# EAGLE board DSP_Lab_SS21_Equalizer_VUMeter_fin (EAGLE 9.6.2)
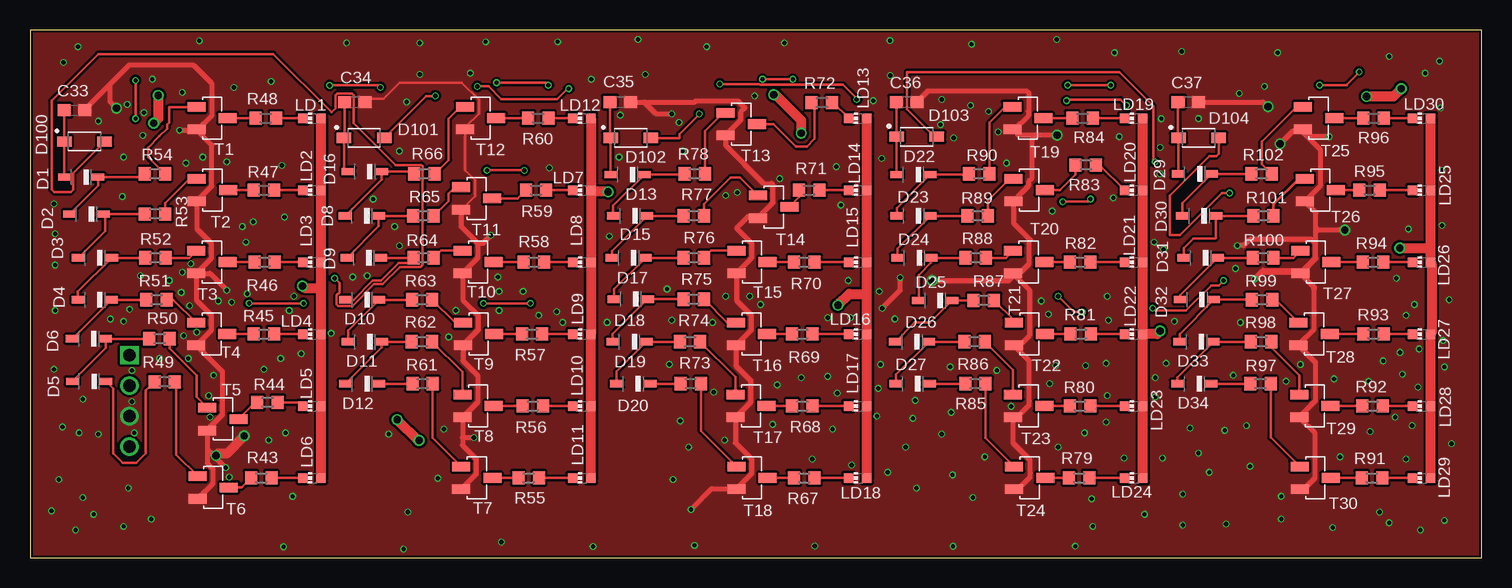
[diagram p0: board, top side]
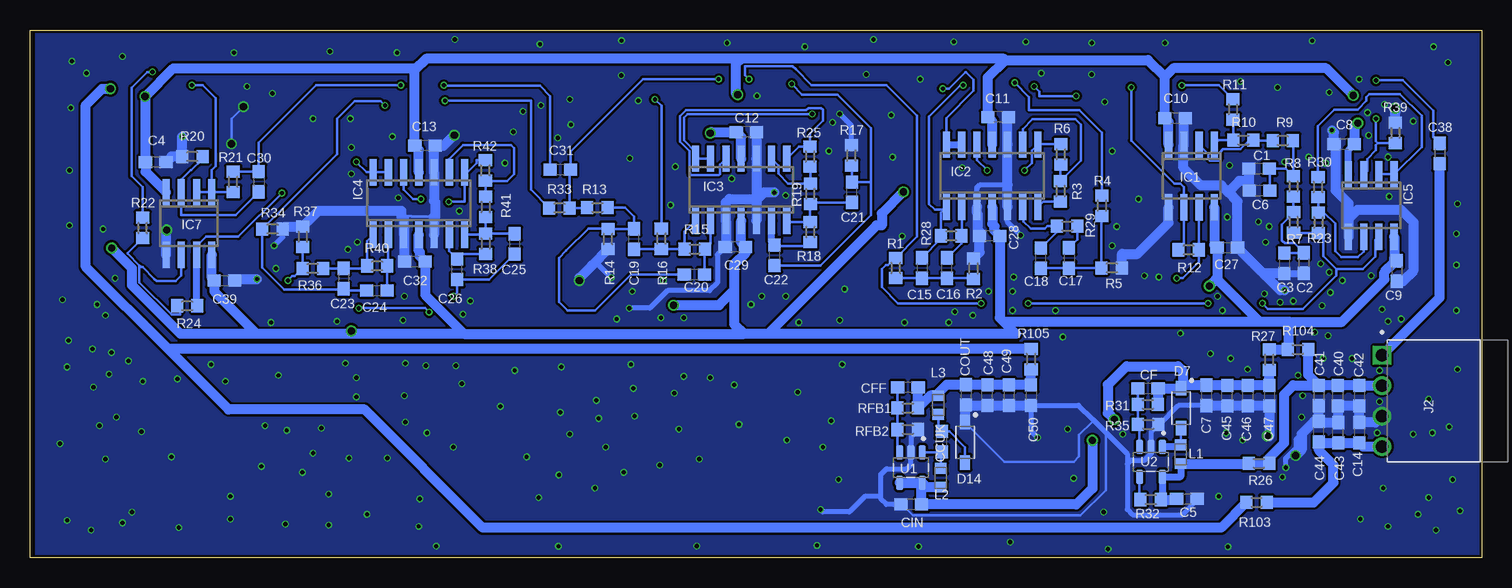
[diagram p1: board, bottom side, seen from below]

Size 121 x 44 mm. Coordinates in mm from the lower left corner, seen from the top.
Outline: 0,44 0,0 121,0 121,44 0,44
Copper layers (1*16): Top 0.018mm / dielectric 1.55mm / Bottom 0.018mm
Design rules "Multi-CB_2L_100µm-Tracks_OL35µm *": minimum track width 0.2mm, minimum drill 0.2mm, track to track 0.1mm, track to pad 0.1mm, pad to pad 0.1mm, via to via 0.1mm, smd to smd 0mil, copper to edge 0.2mm, drill to drill 0.2mm, minimum pad ring 0.125mm, minimum via ring 0.1mm, stop-mask expansion 2mil, vias tented up to drill 0.45mm, thermal gap 0.2mm
Net classes: 0 default: width 0.003 mm, drill 0.1 mm

## Footprints (pad centres in the part's own frame; a part is rotated, then mirrored left to right if it is on the bottom)
C0603 = smd 1.1 x 1: 1 -0.85,0; 2 0.85,0
SODFL2512X100N = smd 1.05 x 0.6: A 1.4,0; C -1.4,0
SOD3715X135L32X57N = smd 1.21 x 0.84: 1 -1.68,0; 2 1.68,0
SO08 = smd 0.6 x 2.2: 1 -1.905,-2.6; 2 -0.635,-2.6; 3 0.635,-2.6; 4 1.905,-2.6; 5 1.905,2.6; 6 0.635,2.6; 7 -0.635,2.6; 8 -1.905,2.6
SO14 = smd 0.6 x 2.2: 1 -3.81,-2.6; 2 -2.54,-2.6; 3 -1.27,-2.6; 4 0,-2.6; 5 1.27,-2.6; 6 2.54,-2.6; 7 3.81,-2.6; 8 3.81,2.6; 9 2.54,2.6; 10 1.27,2.6; 11 0,2.6; 12 -1.27,2.6; 13 -2.54,2.6; 14 -3.81,2.6
TE_640455-4 = drill 1.02 pad 1.37 square: 1 0,0 | drill 1.02 pad 1.37: 2 -2.54,0; 3 -5.08,0; 4 -7.62,0
INDC1608X95N = smd 0.9 x 0.97: 1 -0.785,0; 2 0.785,0
CHIP-LED0603 = smd 0.8 x 0.8: A 0,-0.75; C 0,0.75
R0603 = smd 1 x 1.1: 1 -0.85,0; 2 0.85,0
SOT23-3 = smd 0.8 x 1.5: 1 -0.6,-1.35; 2 1.3,-1.35; 3 0.35,1.25
SOT95P280X145-5N = smd 1.21 x 0.59: 1 -1.255,0.95; 2 -1.255,0; 3 -1.255,-0.95; 4 1.255,-0.95; 5 1.255,0.95

## Placement (x,y rotation side)
C1  220n  [C0603]  18.54,32.42 180 bottom
C2  220n  [C0603]  14.81,24.56 270 bottom
C3  100n  [C0603]  16.44,24.53 270 bottom
C4  100n  [C0603]  110.52,32.98 180 bottom
C5  2.2 uF  [C0603]  24.56,4.9 0 bottom
C6  100n  [C0603]  18.5,30.6 180 bottom
C7  4.7 uF  [C0603]  22.95,13.52 270 bottom
C8  100n  [C0603]  11.45,34.49 0 bottom
C9  100n  [C0603]  7.08,23.9 270 bottom
C10  100n  [C0603]  25.55,36.63 180 bottom
C11  100n  [C0603]  40.3,36.75 180 bottom
C12  100n  [C0603]  61.28,35.5 180 bottom
C13  100n  [C0603]  88.07,34.35 180 bottom
C14  10u  [C0603]  10.18,10.41 270 bottom
C15  100n  [C0603]  46.65,24.15 270 bottom
C16  100n  [C0603]  44.55,24.14 90 bottom
C17  100n  [C0603]  34.39,24.98 270 bottom
C18  100n  [C0603]  36.73,24.97 90 bottom
C19  10n  [C0603]  70.63,26.56 90 bottom
C20  10n  [C0603]  65.61,23.61 0 bottom
C21  10n  [C0603]  52.48,30.47 90 bottom
C22  10n  [C0603]  58.92,25.22 90 bottom
C23  10n  [C0603]  94.86,23.27 270 bottom
C24  10n  [C0603]  92.09,22.28 0 bottom
C25  10n  [C0603]  80.6,26.15 270 bottom
C26  10n  [C0603]  85.38,24.04 90 bottom
C27  100n  [C0603]  21.19,25.84 0 bottom
C28  100n  [C0603]  41,26.82 180 bottom
C29  100n  [C0603]  62.2,25.91 180 bottom
C30  12n  [C0603]  101.92,31.35 270 bottom
C31  15n  [C0603]  76.8,32.35 180 bottom
C32  100n  [C0603]  88.91,24.68 180 bottom
C33  200u  [C0603]  3.71,37.3 0 top
C34  100u  [C0603]  27.09,38 0 top
C35  100u  [C0603]  49.2,38 0 top
C36  100u  [C0603]  73.08,38 0 top
C37  200u  [C0603]  96.55,38 0 top
C38  100n  [C0603]  3.5,33.7 270 bottom
C39  100n  [C0603]  104.79,23.1 0 bottom
C40  10u  [C0603]  11.96,13.5 90 bottom
C41  10u  [C0603]  13.56,13.51 270 bottom
C42  10u  [C0603]  10.19,13.5 270 bottom
C43  10u  [C0603]  11.95,10.41 90 bottom
C44  10u  [C0603]  13.56,10.51 90 bottom
C45  10u  [C0603]  21.2,13.5 90 bottom
C46  10u  [C0603]  19.5,13.5 270 bottom
C47  10u  [C0603]  17.7,13.5 270 bottom
C48  10u  [C0603]  41.2,13.55 90 bottom
C49  10u  [C0603]  39.4,13.55 270 bottom
C50  10u  [C0603]  37.55,13.55 270 bottom
CCUK  1 uF  [C0603]  45,9.66 90 bottom
CF  220 pF  [C0603]  27.8,14.1 180 bottom
CFF  330 pF  [C0603]  47.81,14.2 180 bottom
CIN  22 uF  [C0603]  47.54,4.42 180 bottom
COUT  22 uF  [C0603]  42.98,13.57 270 bottom
D1  1N4148WS  [SODFL2512X100N]  4.27,31.72 180 top
D2  1N4148WS  [SODFL2512X100N]  4.71,28.65 180 top
D3  1N4148WS  [SODFL2512X100N]  5.41,25 180 top
D4  1N4148WS  [SODFL2512X100N]  5.4,21.5 180 top
D5  1N4148WS  [SODFL2512X100N]  4.93,14.7 180 top
D6  1N4148WS  [SODFL2512X100N]  4.9,18.25 180 top
D7  [SOD3715X135L32X57N]  25.04,12.46 270 bottom
D8  1N4148WS  [SODFL2512X100N]  27.67,28.5 180 top
D9  1N4148WS  [SODFL2512X100N]  27.84,25 180 top
D10  1N4148WS  [SODFL2512X100N]  27.69,21.5 180 top
D11  1N4148WS  [SODFL2512X100N]  27.92,18 180 top
D12  1N4148WS  [SODFL2512X100N]  27.69,14.5 180 top
D13  1N4148WS  [SODFL2512X100N]  49.81,31.95 180 top
D14  [SOD3715X135L32X57N]  43.05,9.61 270 bottom
D15  1N4148WS  [SODFL2512X100N]  50.02,28.5 180 top
D16  1N4148WS  [SODFL2512X100N]  27.91,32.2 180 top
D17  1N4148WS  [SODFL2512X100N]  49.9,25 180 top
D18  1N4148WS  [SODFL2512X100N]  50.09,21.55 180 top
D19  1N4148WS  [SODFL2512X100N]  49.97,18 180 top
D20  1N4148WS  [SODFL2512X100N]  50.29,14.5 180 top
D22  1N4148WS  [SODFL2512X100N]  73.64,31.95 180 top
D23  1N4148WS  [SODFL2512X100N]  73.65,28.5 180 top
D24  1N4148WS  [SODFL2512X100N]  73.72,25 180 top
D25  1N4148WS  [SODFL2512X100N]  75.46,21.45 180 top
D26  1N4148WS  [SODFL2512X100N]  73.53,18 180 top
D27  1N4148WS  [SODFL2512X100N]  73.59,14.5 180 top
D29  1N4148WS  [SODFL2512X100N]  97.09,32 180 top
D30  1N4148WS  [SODFL2512X100N]  97.46,28.5 180 top
D31  1N4148WS  [SODFL2512X100N]  97.59,25 180 top
D32  1N4148WS  [SODFL2512X100N]  97.28,21.51 180 top
D33  1N4148WS  [SODFL2512X100N]  97.24,18 180 top
D34  1N4148WS  [SODFL2512X100N]  97.07,14.5 180 top
D100  MMSZ5226B-7-F  [SOD3715X135L32X57N]  4.55,34.7 0 top
D101  MMSZ5226B-7-F  [SOD3715X135L32X57N]  27.85,35 0 top
D102  MMSZ5226B-7-F  [SOD3715X135L32X57N]  50.09,35 0 top
D103  MMSZ5226B-7-F  [SOD3715X135L32X57N]  73.91,35.1 0 top
D104  MMSZ5226B-7-F  [SOD3715X135L32X57N]  97.41,35 0 top
IC1  TL072D  [SO08]  24.18,31.82 180 bottom
IC2  TL074D  [SO14]  40.79,31.84 0 bottom
IC3  TL074D  [SO14]  61.72,30.67 0 bottom
IC4  TL074D  [SO14]  88.59,29.53 0 bottom
IC5  TL072D  [SO08]  9.19,29.36 180 bottom
IC7  TL072D  [SO08]  107.75,27.86 180 bottom
J2  640455-4  [TE_640455-4]  8.29,16.88 90 bottom
L1  10 uH  [INDC1608X95N]  25.08,8.61 90 bottom
L2  10 uH  [INDC1608X95N]  45.07,6.66 90 bottom
L3  10 uH  [INDC1608X95N]  45.29,12.72 90 bottom
LD1  [CHIP-LED0603]  23.5,36.64 90 top
LD2  [CHIP-LED0603]  23.5,30.64 90 top
LD3  [CHIP-LED0603]  23.5,24.64 90 top
LD4  [CHIP-LED0603]  23.5,18.64 90 top
LD5  [CHIP-LED0603]  23.5,12.64 90 top
LD6  [CHIP-LED0603]  23.5,6.64 90 top
LD7  [CHIP-LED0603]  46,30.64 90 top
LD8  [CHIP-LED0603]  46,24.64 90 top
LD9  [CHIP-LED0603]  46,18.64 90 top
LD10  [CHIP-LED0603]  46,12.64 90 top
LD11  [CHIP-LED0603]  46,6.64 90 top
LD12  [CHIP-LED0603]  46,36.64 90 top
LD13  [CHIP-LED0603]  69,36.64 90 top
LD14  [CHIP-LED0603]  69,30.64 90 top
LD15  [CHIP-LED0603]  69,24.64 90 top
LD16  [CHIP-LED0603]  69,18.64 90 top
LD17  [CHIP-LED0603]  69,12.64 90 top
LD18  [CHIP-LED0603]  69,6.64 90 top
LD19  [CHIP-LED0603]  92,36.64 90 top
LD20  [CHIP-LED0603]  92,30.64 90 top
LD21  [CHIP-LED0603]  92,24.64 90 top
LD22  [CHIP-LED0603]  92,18.64 90 top
LD23  [CHIP-LED0603]  92,12.64 90 top
LD24  [CHIP-LED0603]  92,6.64 90 top
LD25  [CHIP-LED0603]  116,30.64 90 top
LD26  [CHIP-LED0603]  116,24.64 90 top
LD27  [CHIP-LED0603]  116,18.64 90 top
LD28  [CHIP-LED0603]  116,12.64 90 top
LD29  [CHIP-LED0603]  116,6.64 90 top
LD30  [CHIP-LED0603]  116,36.64 90 top
R1  3.9K  [R0603]  48.83,24.14 270 bottom
R2  3.7K  [R0603]  42.35,24.09 270 bottom
R3  3.3k  [R0603]  35.09,30.56 90 bottom
R4  1.62K  [R0603]  31.65,29.34 270 bottom
R5  1.54K  [R0603]  30.82,24.16 180 bottom
R6  35K  [R0603]  35.07,33.62 90 bottom
R7  10K  [R0603]  15.67,27.96 90 bottom
R8  10K  [R0603]  15.68,30.96 90 bottom
R9  3K  [R0603]  16.56,34.77 180 bottom
R10  23.2K  [R0603]  19.86,34.81 180 bottom
R11  3.3k  [R0603]  20.73,37.38 90 bottom
R12  35K  [R0603]  24.42,25.66 0 bottom
R13  18.2K  [R0603]  73.7,29.19 0 bottom
R14  5.9K  [R0603]  72.82,26.57 90 bottom
R15  53,6K  [R0603]  65.58,25.72 180 bottom
R16  9.76K  [R0603]  68.37,26.59 90 bottom
R17  3.16K  [R0603]  52.52,33.53 270 bottom
R18  29.1K  [R0603]  55.95,27.15 90 bottom
R19  3.3k  [R0603]  55.94,30.33 90 bottom
R20  4K  [R0603]  107.47,33.45 0 bottom
R21  2K  [R0603]  104.07,31.33 90 bottom
R22  3,3K  [R0603]  111.61,27.49 90 bottom
R23  120K  [R0603]  13.6,27.93 270 bottom
R24  22K  [R0603]  107.9,21 0 bottom
R25  35K  [R0603]  55.97,33.44 90 bottom
R26  0  [R0603]  18.55,7.85 180 bottom
R27  0  [R0603]  17.7,16.5 90 bottom
R28  13K  [R0603]  44.21,26.84 180 bottom
R29  5.23K  [R0603]  34.53,27.64 0 bottom
R30  20K  [R0603]  13.63,30.89 270 bottom
R31  68 K  [R0603]  27.81,12.76 0 bottom
R32  51K  [R0603]  27.57,4.83 0 bottom
R33  10.2K  [R0603]  76.87,29.15 180 bottom
R34  1.82K  [R0603]  100.79,27.4 180 bottom
R35  13.3K  [R0603]  27.78,11.1 0 bottom
R36  6.2K  [R0603]  97.43,24.12 180 bottom
R37  1.13K  [R0603]  98.26,26.75 270 bottom
R38  18.2K  [R0603]  83.02,26.17 90 bottom
R39  15.5K  [R0603]  7.18,35.42 90 bottom
R40  29.4K  [R0603]  92.06,24.33 180 bottom
R41  3.3k  [R0603]  83.01,29.24 90 bottom
R42  35K  [R0603]  83.04,32.29 90 bottom
R43  1K  [R0603]  19.28,6.64 180 top
R44  1K  [R0603]  19.81,12.94 180 top
R45  1K  [R0603]  19.5,18.64 180 top
R46  1K  [R0603]  19.57,24.64 180 top
R47  1K  [R0603]  19.5,30.64 180 top
R48  1K  [R0603]  19.66,36.64 180 top
R49  1K  [R0603]  11.23,14.65 180 top
R50  1K  [R0603]  10.81,18.25 180 top
R51  1K  [R0603]  10.56,21.5 180 top
R52  1K  [R0603]  10.46,25 180 top
R53  1K  [R0603]  10.43,28.65 180 top
R54  1K  [R0603]  10.41,32 180 top
R55  1K  [R0603]  41.58,6.64 180 top
R56  1K  [R0603]  41.92,12.64 180 top
R57  1K  [R0603]  41.86,18.64 180 top
R58  1K  [R0603]  42.02,24.64 180 top
R59  1K  [R0603]  42.19,30.64 180 top
R60  1K  [R0603]  42.37,36.64 180 top
R61  1K  [R0603]  32.73,14.5 180 top
R62  1K  [R0603]  32.68,18 180 top
R63  1K  [R0603]  32.68,21.5 180 top
R64  1K  [R0603]  32.82,25 180 top
R65  1K  [R0603]  32.8,28.5 180 top
R66  1K  [R0603]  32.89,32 180 top
R67  1K  [R0603]  64.54,6.64 180 top
R68  1K  [R0603]  64.39,12.64 180 top
R69  1K  [R0603]  64.39,18.64 180 top
R70  1K  [R0603]  64.55,24.64 180 top
R71  1K  [R0603]  64.95,30.64 180 top
R72  1K  [R0603]  66.01,37.94 180 top
R73  1K  [R0603]  55.08,14.5 180 top
R74  1K  [R0603]  55.02,18 180 top
R75  1K  [R0603]  55.32,21.55 180 top
R76  1K  [R0603]  55.34,25 180 top
R77  1K  [R0603]  55.32,28.5 180 top
R78  1K  [R0603]  55.4,32 180 top
R79  1K  [R0603]  87.46,6.64 180 top
R80  1K  [R0603]  87.53,12.64 180 top
R81  1K  [R0603]  87.6,18.64 180 top
R82  1K  [R0603]  87.55,24.64 180 top
R83  1K  [R0603]  88.01,32.74 180 top
R84  1K  [R0603]  87.74,36.64 180 top
R85  1K  [R0603]  78.81,14.5 180 top
R86  1K  [R0603]  78.74,18 180 top
R87  1K  [R0603]  79.51,21.45 180 top
R88  1K  [R0603]  78.84,25 180 top
R89  1K  [R0603]  79.01,28.5 180 top
R90  1K  [R0603]  79.13,32 180 top
R91  1K  [R0603]  111.87,6.64 180 top
R92  1K  [R0603]  111.92,12.64 180 top
R93  1K  [R0603]  111.99,18.64 180 top
R94  1K  [R0603]  111.96,24.64 180 top
R95  1K  [R0603]  111.67,30.64 180 top
R96  1K  [R0603]  112.02,36.64 180 top
R97  1K  [R0603]  102.57,14.5 180 top
R98  1K  [R0603]  102.64,18 180 top
R99  1K  [R0603]  102.7,21.5 180 top
R100  1K  [R0603]  102.79,25 180 top
R101  1K  [R0603]  102.81,28.5 180 top
R102  1K  [R0603]  102.66,32 180 top
R103  0  [R0603]  18.75,4.6 180 bottom
R104  0  [R0603]  15.3,17.35 0 bottom
R105  0  [R0603]  37.55,16.55 90 bottom
RFB1  29.4K  [R0603]  47.83,12.48 180 bottom
RFB2  5.76K  [R0603]  47.82,10.67 0 bottom
T1  BC846A  [SOT23-3]  15.23,37 270 top
T2  BC846A  [SOT23-3]  15.26,31 270 top
T3  BC846A  [SOT23-3]  15.22,25 270 top
T4  BC846A  [SOT23-3]  15.21,19 270 top
T5  BC846A  [SOT23-3]  16.13,11.9 270 top
T6  BC846A  [SOT23-3]  15.33,6.2 270 top
T7  BC846A  [SOT23-3]  37.3,7 270 top
T8  BC846A  [SOT23-3]  37.41,13 270 top
T9  BC846A  [SOT23-3]  37.45,19 270 top
T10  BC846A  [SOT23-3]  37.42,25 270 top
T11  BC846A  [SOT23-3]  37.29,30.3 270 top
T12  BC846A  [SOT23-3]  37.62,37 270 top
T13  BC846A  [SOT23-3]  59.34,36.5 270 top
T14  BC846A  [SOT23-3]  62.05,29.6 270 top
T15  BC846A  [SOT23-3]  60.25,25 270 top
T16  BC846A  [SOT23-3]  60.2,19 270 top
T17  BC846A  [SOT23-3]  60.16,13 270 top
T18  BC846A  [SOT23-3]  60.25,7 270 top
T19  BC846A  [SOT23-3]  83.24,37 270 top
T20  BC846A  [SOT23-3]  83.34,31 270 top
T21  BC846A  [SOT23-3]  83.3,25 270 top
T22  BC846A  [SOT23-3]  83.37,19 270 top
T23  BC846A  [SOT23-3]  83.3,13 270 top
T24  BC846A  [SOT23-3]  83.38,7 270 top
T25  BC846A  [SOT23-3]  107.47,37 270 top
T26  BC846A  [SOT23-3]  107.62,31 270 top
T27  BC846A  [SOT23-3]  107.25,25 270 top
T28  BC846A  [SOT23-3]  107.1,19 270 top
T29  BC846A  [SOT23-3]  107.17,13 270 top
T30  BC846A  [SOT23-3]  107.19,7 270 top
U1  LM2611  [SOT95P280X145-5N]  47.56,7.5 270 bottom
U2  LMR62014  [SOT95P280X145-5N]  27.55,7.97 270 bottom

## Library data of the parts
C1-C4 C6 C8-C37 C39-C50 R1-R105 RFB1 RFB2 = rcl
C5 C7 C38 CCUK CF CFF CIN COUT = rcl; SPICEPREFIX: C
D1-D6 D8-D13 D15-D20 D22-D27 D29-D34 = 1N4148WS; AVAILABILITY: Good; DESCRIPTION: Diode Standard 75V 150mA Surface Mount SOD-323F; MF: ON Semiconductor; MP: 1N4148WS; PACKAGE: SOD-323FL-2 ON Semiconductor; PRICE: None; PURCHASE-URL: https://pricing.snapeda.com/search/part/1N4148WS/?ref=eda
D7 D14 D100-D104 = MMSZ5226B-7-F; AVAILABILITY: Good; DESCRIPTION: Zener Diode 3.3V 500mW ±5% Surface Mount SOD-123; MF: Diodes Inc.; MP: MMSZ5226B-7-F; PACKAGE: SOD-123 Diodes Inc.; PRICE: None; PURCHASE-URL: https://pricing.snapeda.com/search/part/MMSZ5226B-7-F/?ref=eda
IC1-IC5 IC7 = linear
J2 = 640455-4; AVAILABILITY: In Stock; CENTERLINE_PITCH: 2.54 mm[.1 in]; COMMENT: 640455-4; DESCRIPTION: Headers & Receptacles cable a placa 8 POS MONO SHAPE MKII TAB ASS'Y GW 750.N TYCO / TE CONNECTIVITY; MF: TE Connectivity; MP: 640455-4; NUMBER_OF_POSITIONS: 4; PACKAGE: None; PRICE: None; PRODUCT_TYPE: Connector; PURCHASE-URL: https://pricing.snapeda.com/search/part/640455-4/?ref=eda
L1-L3 = ASMCI-0603-100M-T; AVAILABILITY: Good; DESCRIPTION: 10µH Shielded Multilayer Inductor 50mA 900mOhm 0603 (1608 Metric); MF: Abracon LLC; MP: ASMCI-0603-100M-T; PACKAGE: 1608 Taiyo Yuden; PRICE: None; PURCHASE-URL: https://pricing.snapeda.com/search/part/ASMCI-0603-100M-T/?ref=eda
LD1-LD30 = led
T1-T9 T11-T30 = BC846A; AVAILABILITY: Unavailable; DESCRIPTION: Bipolar (BJT) Transistor NPN 65V 100mA 100MHz 300mW Surface Mount SOT-23-3 (TO-236); MF: ON Semiconductor; MP: BC846A; PACKAGE: SOT-23-3 Motorola; PRICE: None
T10 = BC846A; AVAILABILITY: Unavailable; DESCRIPTION: Bipolar (BJT) Transistor NPN 65V 100mA 100MHz 300mW Surface Mount SOT-23-3 (TO-236); MF: ON Semiconductor; MP: BC846A; PACKAGE: SOT-23-3 Motorola; PRICE: None; SPICEPREFIX: J
U1 = LM2611BMFX_NOPB; AVAILABILITY: Good; DESCRIPTION: 1.4MHz Cuk Converter 5-SOT-23 -40 to 125; MF: Texas Instruments; MP: LM2611BMFX/NOPB; PACKAGE: SOT-23-5 Texas Instruments; PRICE: None; PURCHASE-URL: https://pricing.snapeda.com/search/part/LM2611BMFX/NOPB/?ref=eda
U2 = LMR62014XMF_NOPB; AVAILABILITY: Good; DESCRIPTION: SIMPLE SWITCHER&reg; 2.7V to 14V, 1.4A Step-Up Regulator in SOT-23 Package 5-SOT-23 -40 to 125; MF: Texas Instruments; MP: LMR62014XMF/NOPB; PACKAGE: SOT-23-5 Texas Instruments; PRICE: None; PURCHASE-URL: https://pricing.snapeda.com/search/part/LMR62014XMF/NOPB/?ref=eda

## Nets
+7,5V: C7.1 C45.2 C46.1 C47.1 CF.1 CIN.1 D7.1 L2.1 R27.1 R31.2 U1.4 U1.5
-7,5V: C48.2 C49.1 C50.1 CFF.1 COUT.1 L3.2 R105.1 RFB1.1
BP1_OUT: D101.2 IC2.13 IC2.14
BP2_OUT: D102.2 IC3.13 IC3.14
BP3_OUT: D103.2 IC4.13 IC4.14
GND: C1.2 C2.2 C3.2 C4.1 C5.2 C6.2 C7.2 C8.1 C9.2 C10.1 C11.1 C12.1 C13.1 C14.1 C27.2 C28.2 C29.2 C32.2 C33.2 C34.2 C35.2 C36.2 C37.2 C39.2 C40.1 C41.2 C42.2 C43.2 C44.2 C45.1 C46.2 C47.2 C48.1 C49.2 C50.2 CIN.2 COUT.2 D14.1 IC1.3 IC1.5 IC2.3 IC2.5 IC2.10 IC3.3 IC3.5 IC3.10 IC4.3 IC4.5 IC4.10 IC5.5 IC7.5 J2.3 R2.1 R5.1 R14.1 R17.1 R20.1 R34.1 R35.2 R37.1 R39.2 RFB2.2 T1.2 T2.2 T3.2 T4.2 T5.2 T6.2 T7.2 T8.2 T9.2 T10.2 T11.2 T12.2 T13.2 T14.2 T15.2 T16.2 T17.2 T18.2 T19.2 T20.2 T21.2 T22.2 T23.2 T24.2 T25.2 T26.2 T27.2 T28.2 T29.2 T30.2 U1.2 U2.2
HP_OUT: D104.2 IC7.7 R24.2
IN2,1V: C38.2 J2.1
MAIN-5V: C14.2 C43.1 C44.1 J2.4 R103.1
N$2: C1.1 C6.1 R8.2 R9.1
N$3: IC1.2 R9.2 R10.1
N$4: C2.1 C3.1 R7.2 R8.1
N$5: C31.1 IC5.7 R1.1 R7.1 R13.1 R23.2 R33.1
N$7: IC2.9 R3.2 R6.1
N$8: IC1.1 R10.2 R11.1
N$9: IC3.9 R19.2 R25.1
N$10: IC1.6 R11.2 R12.1
N$11: C15.2 C16.1 R1.2 R2.2
N$12: C16.2 IC2.2 R28.1
N$13: C15.1 IC2.1 R4.1 R28.2
N$15: C19.2 C20.1 R13.2 R14.2
N$16: C17.1 R29.2
N$17: C18.2 IC2.6 R29.1
N$18: C21.1 IC3.7 R18.2 R19.1
N$19: C20.2 IC3.2 R15.1
N$20: C19.1 IC3.1 R15.2 R16.1
N$21: R32.1 U2.4
N$22: CF.2 R31.1 R35.1 U2.3
N$23: C21.2 C22.1 R16.2 R17.2
N$24: C22.2 IC3.6 R18.1
N$25: IC4.8 IC4.12 R42.2
N$26: C23.1 IC4.1 R36.1 R40.2
N$27: C23.2 C24.1 R33.2 R34.2
N$28: C24.2 IC4.2 R40.1
N$29: IC5.6 R23.1 R30.2
N$30: D15.C D17.A R77.2
N$31: C25.2 C26.1 R36.2 R37.2
N$32: C26.2 IC4.6 R38.1
N$33: D17.C D18.A R76.2
N$34: C30.2 IC7.3 R20.2
N$35: C17.2 C18.1 R4.2 R5.2
N$36: IC7.1 IC7.2 R21.1 R22.2
N$37: D23.C D24.A R89.2
N$38: C30.1 C31.2 R21.2
N$39: IC7.6 R22.1 R24.1
N$40: LD6.C R43.1
N$41: LD5.C R44.1
N$42: IC5.1 IC5.2 R30.1
N$43: LD4.C R45.1
N$44: LD3.C R46.1
N$45: LD2.C R47.1
N$46: LD1.C R48.1
N$47: C38.1 IC5.3 R39.1
N$48: C25.1 IC4.7 R38.2 R41.1
N$49: R43.2 T6.3
N$50: R44.2 T5.3
N$51: R45.2 T4.3
N$52: R46.2 T3.3
N$53: R47.2 T2.3
N$54: R48.2 T1.3
N$55: R49.1 T6.1
N$56: R50.1 T5.1
N$57: R51.1 T4.1
N$58: R52.1 T3.1
N$59: R53.1 T2.1
N$60: R54.1 T1.1
N$61: C33.1 D1.A D100.1
N$62: D1.C D2.A R54.2
N$63: D2.C D3.A R53.2
N$64: D3.C D4.A R52.2
N$65: D4.C D6.A R51.2
N$66: D5.A D6.C R50.2
N$67: D5.C R49.2
N$68: LD11.C R55.1
N$69: LD10.C R56.1
N$70: LD9.C R57.1
N$71: LD8.C R58.1
N$72: LD7.C R59.1
N$73: LD12.C R60.1
N$74: D7.2 L1.2 U2.1
N$75: R55.2 T7.3
N$76: R56.2 T8.3
N$77: R57.2 T9.3
N$78: R58.2 T10.3
N$79: R59.2 T11.3
N$80: R60.2 T12.3
N$81: R61.1 T7.1
N$82: R62.1 T8.1
N$83: R63.1 T9.1
N$84: R64.1 T10.1
N$85: R65.1 T11.1
N$86: R66.1 T12.1
N$87: C34.1 D16.A D101.1
N$88: D8.A D16.C R66.2
N$89: D8.C D9.A R65.2
N$90: D9.C D10.A R64.2
N$91: D10.C D11.A R63.2
N$92: D11.C D12.A R62.2
N$93: D12.C R61.2
N$94: LD18.C R67.1
N$95: LD17.C R68.1
N$96: LD16.C R69.1
N$97: LD15.C R70.1
N$98: LD14.C R71.1
N$99: LD13.C R72.1
N$100: IC3.8 IC3.12 R25.2
N$101: R67.2 T18.3
N$102: R68.2 T17.3
N$103: R69.2 T16.3
N$104: R70.2 T15.3
N$105: R71.2 T14.3
N$106: R72.2 T13.3
N$107: R73.1 T18.1
N$108: R74.1 T17.1
N$109: R75.1 T16.1
N$110: R76.1 T15.1
N$111: R77.1 T14.1
N$112: R78.1 T13.1
N$113: C35.1 D13.A D102.1
N$114: D13.C D15.A R78.2
N$115: IC2.8 IC2.12 R6.2
N$117: D18.C D19.A R75.2
N$118: D19.C D20.A R74.2
N$119: D20.C R73.2
N$120: LD24.C R79.1
N$121: LD23.C R80.1
N$122: LD22.C R81.1
N$123: LD21.C R82.1
N$124: LD20.C R83.1
N$125: LD19.C R84.1
N$126: CCUK.2 D14.2 L3.1
N$127: R79.2 T24.3
N$128: R80.2 T23.3
N$129: R81.2 T22.3
N$130: R82.2 T21.3
N$131: R83.2 T20.3
N$132: R84.2 T19.3
N$133: R85.1 T24.1
N$134: R86.1 T23.1
N$135: R87.1 T22.1
N$136: R88.1 T21.1
N$137: R89.1 T20.1
N$138: R90.1 T19.1
N$139: C36.1 D22.A D103.1
N$140: D22.C D23.A R90.2
N$141: CCUK.1 L2.2 U1.1
N$142: D24.C D25.A R88.2
N$143: D25.C D26.A R87.2
N$144: D26.C D27.A R86.2
N$145: D27.C R85.2
N$146: LD29.C R91.1
N$147: LD28.C R92.1
N$148: LD27.C R93.1
N$149: LD26.C R94.1
N$150: LD25.C R95.1
N$151: LD30.C R96.1
N$152: CFF.2 RFB1.2 RFB2.1 U1.3
N$153: R91.2 T30.3
N$154: R92.2 T29.3
N$155: R93.2 T28.3
N$156: R94.2 T27.3
N$157: R95.2 T26.3
N$158: R96.2 T25.3
N$159: R97.1 T30.1
N$160: R98.1 T29.1
N$161: R99.1 T28.1
N$162: R100.1 T27.1
N$163: R101.1 T26.1
N$164: R102.1 T25.1
N$165: C37.1 D29.A D104.1
N$166: D29.C D30.A R102.2
N$167: D30.C D31.A R101.2
N$168: D31.C D32.A R100.2
N$169: D32.C D33.A R99.2
N$170: D33.C D34.A R98.2
N$171: D34.C R97.2
N$181: IC2.7 R3.1
N$183: IC4.9 R41.2 R42.1
PB5V: C5.1 C40.2 C41.1 C42.1 J2.2 L1.1 R26.1 R26.2 R32.2 R104.2 U2.5
TP_OUT: D100.2 IC1.7 R12.2
V+: C9.1 C27.1 C28.1 C29.1 C32.1 C39.1 IC1.8 IC2.4 IC3.4 IC4.4 IC5.8 IC7.8 LD1.A LD2.A LD3.A LD4.A LD5.A LD6.A LD7.A LD8.A LD9.A LD10.A LD11.A LD12.A LD13.A LD14.A LD15.A LD16.A LD17.A LD18.A LD19.A LD20.A LD21.A LD22.A LD23.A LD24.A LD25.A LD26.A LD27.A LD28.A LD29.A LD30.A R27.2 R104.1
V-: C4.2 C8.2 C10.2 C11.2 C12.2 C13.2 IC1.4 IC2.11 IC3.11 IC4.11 IC5.4 IC7.4 R103.2 R105.2

## Tracks (layer width: path | path; a pad name or v marks a point on that pad's centre or on a via)
+7,5V  (via drill 0.6)
  Top 0.2: 32.34,9.76 v32.44,9.76
  Top 0.813: v30.6,11.5 32.34,9.76
  Bottom 0.406: 46.69,6.17 U1.5
  Bottom 0.813: R31.2 26.95,12.78 CF.1 25.09,14.1 D7.1 24.81,14.37 | U1.4 U1.5 46.24,5.87 L2.1 | R27.1 C47.1 C46.1 C45.2 22.93,14.35 C7.1 24.81,14.37 | v30.6,11.5 31.15,12.05 31.15,14.4 29.6,15.95 25.3,15.95 24.91,15.56 24.91,14.37 24.81,14.37 | v32.44,9.76 32.44,5.76 33.77,4.42 CIN.1 46.69,6.17
-7,5V
  Bottom 0.813: CFF.1 46.96,12.49 RFB1.1 45.95,13.51 L3.2 45.29,13.71 44.58,14.42 COUT.1 42.96,14.4 C48.2 C49.1 C50.1 R105.1
BP1_OUT  (via drill 0.35 pad 0.2)
  Top 0.2: v33.8,38.5 33.03,38.5 D101.2 | v37.3,39.3 38.21,39.3 39.27,38.24 43.94,38.24 44.8,39.1 v44.9,39.1
  Bottom 0.2: IC2.14 44.6,36.66 42.34,38.92 42.34,39.84 42.99,40.49 43.01,40.49 44.4,39.1 v44.9,39.1 | v33.8,38.5 36.87,38.5 36.87,38.87 v37.3,39.3
  Bottom 0.6: IC2.14 IC2.13
BP2_OUT  (via drill 0.35 pad 0.2)
  Top 0.2: D102.2 54.13,35 54.13,35.33 v55.8,37
  Bottom 0.2: IC3.13 IC3.14 65.53,33.83 66.5,34.8 66.5,36.7 66.2,37 v55.8,37
BP3_OUT  (via drill 0.35 pad 0.2)
  Top 0.2: D103.2 75.5,35 73.11,37.4 73.11,40.49 90.8,40.49 93.64,37.65 93.64,33.16 v93.8,33
  Bottom 0.2: IC4.13 IC4.14 92.93,32.13 v93.8,33
GND  (via drill 0.35, 0.35 pad 0.2, 0.6)
  Top 0.2: 36.1,23.67 T10.2 | 4.56,37.36 C33.2 | C34.2 28.21,38.27 29.5,38.27 30.82,39.6 35.99,39.6 37.42,38.17 37.42,37.03 36.27,35.88 T12.2 36.27,32.29 37.09,31.47 37.09,30.16 T11.2 | 82.07,23.57 T21.2 | 105.96,11.56 T29.2 | 105.82,17.62 T28.2 | T27.2 106,23.7 | 106.12,35.48 106.12,35.6 T25.2 | 82.35,35.24 81.99,35.59
  Top 0.203: v102.07,23.23 102.55,23.7 T27.2
  Top 0.406: 4.56,37.36 6.7,39.5 | T27.2 107.1,22.5 107,22.4 107,18.99 105.82,17.81 105.82,17.62 107.16,16.29 107.16,13.07 105.96,11.87 105.96,11.56 107.09,10.42 107.09,6.61 107.1,6.6 106.2,5.7 T30.2 | 106,23.7 107.2,24.9 107.2,27.5 | 107.2,27.5 107.2,28.77 T26.2 107.6,31.03 107.6,34 106.12,35.48 | v7.21,37.49 6.7,38 6.7,39.5 | v85.63,35.24 83.9,35.24 | 83.9,35.24 82.35,35.24 | C37.2 102.8,38 v103.2,37.6 | v104.2,34.5 105.3,35.6 106.12,35.6 | v109.6,27.3 107.4,27.3 107.2,27.5 | v75.2,23.1 81.6,23.1 82.07,23.57 | T24.2 82.37,5.7 83.37,6.7 83.37,8.13 81.95,9.55 T23.2 82.29,11.7 83.29,12.7 83.29,16.43 T22.2 82.5,17.7 83.3,18.5 83.3,22.35 T21.2 82.49,23.7 83.29,24.5 83.29,26.39 83.4,26.5 81.99,27.91 T20.2 81.99,29.73 83.25,30.99 83.25,31.34 83.5,31.6 83.5,34.84 83.9,35.24 | 81.99,35.59 83.23,36.83 83.23,37.26 83.28,37.32 83.28,38.72 83.1,38.9 74.83,38.9 C36.2 | C35.2 51.2,38 | 51.2,38 55.41,38 55.51,38.1 59,38.1 59.6,37.5 59.24,37.15 59.24,36.49 57.99,35.23 T13.2 57.99,34.38 61.16,31.2 61.81,31.2 61.95,31.05 61.95,29.59 60.83,28.47 | 58.9,5.73 T18.2 | 58.9,5.73 60.16,6.99 60.16,8.21 58.81,9.56 T17.2 60.06,12.96 60.06,14.77 58.85,15.99 T16.2 60.1,18.96 60.1,20.21 58.9,21.42 T15.2 58.9,23.73 60.16,24.99 60.16,26.21 58.9,27.47 59.9,28.47 60.83,28.47 | 37.33,26.21 37.33,24.99 36.1,23.77 36.1,23.67 | T11.2 35.94,27.6 37.33,26.21 | T10.2 36.07,21.5 37.35,20.21 37.35,18.99 36.1,17.73 T9.2 36.1,16.4 37.31,15.18 37.31,12.96 T8.2 36.06,10 | 36.06,10 36.06,9.36 37.2,8.21 37.2,6.96 T7.2 | T3.2 15.12,24.96 15.12,26.21 13.91,27.43 T2.2 13.91,29.73 15.16,30.99 15.16,34.41 13.94,35.63
  Top 0.406: T3.2 13.87,21.46 15.12,20.21 15.12,18.96 T4.2 16.04,15.52 16.04,11.89 14.78,10.63 T5.2 | T5.2 14.78,7.87 15.23,7.41 15.23,6.16 T6.2 | 6.7,39.5 8.3,41.1 13.6,41.1 15.13,39.56 15.13,36.83 13.94,35.63 | v53.5,37 52.2,37 51.2,38 | v55.1,4 56.83,5.73 58.9,5.73 | v108.3,35.1 106.72,35.1 T25.2 | v37,10 36.06,10 | v102.07,23.23 102.79,23.94 106.11,23.94 107.16,24.99 107.16,26.21 106.86,26.51 101.68,26.51 101.18,26.01 v100.65,26.01 | T3.2 15,23.7 v16.4,22.3 | T5.2 14.78,9.04 v16.31,7.5 | v71.04,20.8 72.55,22.3 v72.55,23.35 | 60.83,28.47 60.7,28.33 T14.2 | 37.33,26.21 37.75,26.21 v38.42,26.88 | v12.47,35.63 13.94,35.63
  Top 0.813: v17.87,10.14 16.38,8.65 15.65,8.65 v15.5,8.5
  Bottom 0.2: v7.21,37.49 7.21,37.21 7.18,37.19 | 27.55,8.79 U2.2 | 31.32,5.62 33.42,3.52 47.41,3.52 48.32,4.42 49,4.42 | v103.2,37.6 104.2,36.6 v104.2,34.5 | 109.66,27.25 v109.6,27.3 | 90.05,28.46 89.22,28.46 89.19,28.44 87.78,28.44 87.21,29 | 73.57,24.37 74.17,24.37
  Bottom 0.203: C39.2 103.81,23.23 | D14.1 39.77,8 34,8 33.55,8.45 33.55,10.22 32.45,11.32 32.45,11.55 | 31.32,5.62 31.32,10.42 31.45,10.55
  Bottom 0.406: C7.2 25.25,12.67 26.83,11.1 R35.2 27.55,10.47 U2.2 | 29.53,7.8 29.53,4.01 29.09,3.58 24.91,3.58 23.71,4.77 C5.2 | RFB2.2 47.56,10.07 U1.2 47.56,7.74 47.9,7.4 49.6,7.4 50.1,6.9 50.1,5.1 | 29.53,7.8 29.53,8.63 31.45,10.55 32.45,11.55 33.6,12.7 C50.2 37.55,10.55 v37,10 | 29.53,7.8 29.22,8.11 28.09,8.11 27.55,8.64 27.55,8.79 | CIN.2 49,4.42 49.62,4.42 50.1,4.9 50.1,5.1 | R17.1 52.52,36.02 v53.5,37 | 50.1,5.1 51.4,5.1 52.7,3.8 54.9,3.8 v55.1,4 | v100.65,26.01 99.94,26.73 R34.1 | v16.31,7.5 16.31,8.29 15.46,9.14 15.46,9.84 15,10.3 | v72.55,23.35 73.57,24.37 | v71.04,20.8 69.32,20.8 67.85,22.26 64.34,22.26 63.7,22.9 63.7,25.25 C29.2 | IC2.3 42.06,30.76 42.1,30.8 41.8,31.1 39.52,31.1 | v38.42,26.88 39.52,27.98 IC2.5
  Bottom 0.6: 22.93,12.65 C7.2 | C3.2 14.84,23.68 C2.2 | C12.1 60.45,35.48 | 62.99,25.97 C29.2 | R34.1 99.74,27.6 | IC4.3
  Bottom 0.813: C9.2 6.55,23.05 5.65,23.95 5.65,27.95 6.7,29 10.35,29 11.1,28.25 | J2.3 8.83,11.26 C14.1 C42.2 C40.1 C43.2 13.46,11.26 C44.2 | 22.93,12.65 C45.1 C46.2 C47.2 17.7,10.1 17.83,10.1 v17.87,10.14 | C3.2 18.18,23.68 | 18.18,23.68 C27.2 20.34,29.69 21.12,30.48 | 11.1,28.25 11.1,29.55 12.18,30.64 12.18,34.37 C8.1 12.3,35.46 v12.47,35.63 | C11.1 39.52,36.68 IC2.10 39.52,31.1 IC2.5 | IC2.3 42.06,28.71 41.98,28.63 41.98,27.32 41.85,27.19 C28.2 41.85,25.45 R2.1 | 60.45,35.48 IC3.10 60.45,29.8 | 62.99,25.97 IC3.3 62.99,29.61 62.7,29.9 60.55,29.9 60.45,29.8 | 99.74,27.6 R37.1 96.96,28.9 90.05,28.9 90.05,28.46 89.85,28.26 89.85,27.6 | C4.1 109.2,33.45 R20.1 108.32,35.08 v108.3,35.1 | D14.1 43.05,12.64 COUT.2 42.96,12.7 C48.1 C49.2 C50.2 | R39.2 7.18,37.19 | v85.63,35.24 86.52,34.35 C13.1 87.32,34.25 IC4.10 87.32,29.74 87.21,29.64 87.21,29 87.21,28.46 87.32,28.36 IC4.5 | IC7.5 109.66,27.25 | R14.1 74.17,24.37 75.2,23.33 v75.2,23.1 | v15.5,8.5 15,8.99 15,10.3 13.94,11.36 C44.2 | 103.81,23.23 v102.07,23.23 | 89.85,27.6 IC4.3 | v16.4,22.3 16.8,22.3 18.18,23.68 | 60.45,29.8 IC3.5 | 21.12,30.48 21.68,31.03 23.38,31.03 24.85,32.5 24.85,34.38 IC1.3 24.82,36.52 C10.1 | C6.2 19.36,31.4 | 19.36,31.4 19.36,32.39 C1.2 | 19.36,31.4 20.2,31.4 21.12,30.48 | R5.1 29.98,25.33 28.67,25.33 26.09,27.91 IC1.5 | v58.96,30.44 59.81,30.44 60.45,29.8 | C32.2 89.76,25.05 89.78,25.07 89.78,27.53 89.85,27.6 | C44.2 C41.2 | 11.1,28.25 IC5.5
  other vias: 2.8,41.3 8.1,37.8 5.7,36.4 4,42.6 14.12,43.1 26.38,42.91 37.98,43.01 32.48,42.91 43.98,43.01 50.68,43.21 62.88,42.91 71.68,43.11 78.48,42.81 85.58,43.21 55.39,1.02 65.41,0.95 76.94,0.94 87.14,0.95 46.94,0.92 39.28,1.29 31.14,0.7 21.14,0.9 56.4,42.6 2,29.5 2.1,27 2.1,24.4 2.1,20.6 2,15.7 5.7,10.3 4.1,10.4 2.7,10.9 4.4,13.2 8.2,5.8 10.1,3.2 7.8,2.6 5.3,3.6 3.8,2.3 4.4,5 1.8,3.9 2.4,6.5 8.5,13 8.7,10.4 8.5,15.6 16.6,6.7 21.9,5.1 19.9,9.8 21.3,10.4 15,11.7 14.9,13.5 15.3,15.2 6.7,19.9 7.8,19.7 8.3,20.7 13.2,16.6 10.8,16.6 13.9,18.8 12.8,18.5 25.1,18.7 22.6,17 20.9,16.6 19.5,15.7 31.5,3.8 34,6.6 29.9,10.3 34.5,10.7 34.9,18.4 53.6,6.5 54.9,9.2 57.9,9.8 54.2,11.4 53.3,16.1 57,13.8 78.6,5 73.9,5.8 71.5,7.1 68.5,7.7 65.2,8.2 76.9,6.9 79.6,8.4 73,9.2 66.9,10.7 61.9,11.1 62.3,14.4 64.3,15 66.5,15.1 67.3,13.7 70.6,11.8 73.6,11.6 76,10.3 76.8,12.1 73.8,13.1 70.7,14.1 70.9,16.1 76.7,15.9 85.7,9.2 81.8,12.6 80.6,15.6 88.6,2.6 88.5,4.9 87.9,10.4 85,14.5 89.7,11.3 89.8,13.5 85.5,16 88,16 89.7,16.2 93.8,13.4 93.8,15 94.7,16.2 104.7,14.7 100.3,15.2 105.9,16.1 91.2,8.3 92.9,3.6 94.4,8.3 96.1,5.3 96.1,2.7 99.7,2.8 98.3,7.1 97.4,8.7 96.7,10.8 99.6,10.6 101.4,11 101.7,7.6 104.3,5.1 104.3,3.2 108.6,2.5 113.3,2.9 115.9,2.3 117.9,3.1 112.5,3.8 118.5,9.5 109.2,8.4 114.7,8.2 111.7,10.5 113.8,11.7 115.2,11 113.9,23.3 108.7,14.9 111.6,14.7 115.7,14.2 117.9,15.9 114.4,15.3 112.8,16.4 114.2,17.1 115.8,17.4 117.8,18.1 114.7,20.2 115.4,21.1 118.3,21.5 117.7,27.7 114.9,27.4 117.7,32.3 117.6,37.5 116.3,40.4 117.5,41.4 113.3,41.8 102.9,39.3 100.8,38.7 104,42.1 90.4,42.1 96,42.2 97.4,36.6 94.3,36.6 94.2,34.2 90.8,35.1 94.2,32 100.5,24.1 100.9,19.6 95.4,19.7 89.9,19.8 94.5,25.7 93.7,26.3 89.8,21.8 90.3,30 84.3,21.4 84.9,20.3 72.1,19.9 68.4,20 66.5,20 70.8,22.2 68.2,23.1 35.5,20.6 39.1,20.6 42.4,20.2 41.1,22.2 44.4,19.6 43.9,20.5 48.1,19.6 56.9,19.6 53.5,19.8 53.1,22.4 60.9,21.1 60,21.8 58,21.8 48.3,26.8 39.1,22.2 39,23.4 28.1,23.5 26.9,23.4 30.8,26 30.4,27.6 28.6,29.9 7.8,33.4 9.4,35.2 9.5,37.1 7.7,30.1 9.2,23.5 11.6,23.1 12.6,22.1 13.3,21 12.7,23.8 13.4,24.5 15.7,21.4 16.8,21.3 18.1,22 21.6,20.6 22,21.8 13,32.9 14.4,33.4 18,26.3 17.7,27.6 18.6,28 21.2,28.4 16.4,33 21,32.7 10.2,39.9 12.7,38.8 17,39.2 20.1,39.7 30.8,33.9 31.4,38 32.5,40.3 36.7,40.4 49.2,36.9 49.1,33.4 43.3,32.5 54.1,36.3 54.4,33.9 58,30.2 46.8,39.9 51.3,40.3 71.7,40.2 70.3,38.1 60.4,38.5 67.6,29.4 62.5,31.6 67.2,32.6 71,33.3 85.2,28.9 75.9,36.1 77,35 80.7,35.5 81.4,32.9 79.9,37.2 78.4,37.7 76,38.2
  pour Bottom (isolate 0.2, no thermals): -1,44.2 -1,-1.8 120.5,-1.8 120.5,44.2
  pour Top (isolate 0.2, no thermals): -2,45 -2,-1 122,-1 122,45
HP_OUT  (via drill 0.35 pad 0.2)
  Top 0.2: v100,30.4 99.36,30.4 95.86,26.9 95,26.9 95,30.2 98.3,33.5 98.9,33.5 99.09,33.69 D104.2
  Bottom 0.2: 107.11,21.07 107.11,25.96 106.31,26.77 103.64,26.77 v100,30.4
  Bottom 0.6: R24.2 107.11,21.07 IC7.7
IN2,1V
  Bottom 0.813: J2.1 3.5,21.67 C38.2
MAIN-5V
  Bottom 0.813: R103.1 14,4.6 12.35,6.25 12.35,7.73 13.56,8.94 C44.1 13.46,9.56 C43.1 C14.2 9.88,9.26 J2.4
N$2
  Bottom 0.2: 15.69,34.75 R8.2 16.3,32.42 C1.1 17.66,32.39 C6.1
  Bottom 0.6: 15.69,34.75 R9.1
N$3
  Bottom 0.2: R9.2 19.04,34.77 R10.1 19.37,34.8 20.12,34.05 21.55,34.05 21.77,33.83 21.77,33.24 21.89,33.12 22.66,33.12 22.77,33.24 22.77,33.65 IC1.2
N$4
  Bottom 0.2: R8.1 15.67,30.09 R7.2 15.67,28.74 16.63,27.78 16.63,26.45 16.39,26.21 15.61,26.21 C2.1 16.41,25.41
  Bottom 0.6: 16.41,25.41 C3.1
N$5  (via drill 0.35 pad 0.2)
  Top 0.2: v18.26,21.2 v22.8,21.2 | v37.8,21.2 v41.7,21.2 | v61.06,39.9 v63.6,39.9
  Bottom 0.2: 12.11,24.07 9.89,24.07 8.84,25.12 8.84,26.47 IC5.7 | 12.11,24.07 13.18,25.14 13.18,26.67 R23.2 15.64,27.08 | 74.58,29.15 R33.1 76.02,32.28 | C31.1 75.95,33.85 69.9,39.9 v63.6,39.9 | 48.83,25.05 49.48,24.4 49.63,24.4 49.99,24.05 49.99,22.54 48.64,21.2 v41.7,21.2 | R1.1 47.05,26.78 47.05,36.85 49.6,39.4 55.85,39.4 | 12.11,24.07 12.11,23.53 14.9,20.74 17.8,20.74 v18.26,21.2 | v22.8,21.2 v37.8,21.2 | 57.17,40.71 57.45,40.99 61.4,40.99 61.4,40.24 v61.06,39.9
  Bottom 0.203: 55.85,39.4 57.17,40.71
  Bottom 0.6: R7.1 15.64,27.08 | 74.58,29.15 R13.1 | 76.02,32.28 C31.1 | R1.1 48.83,25.05
N$7
  Bottom 0.2: 35.09,32.74 R3.2 33.4,33.1 33.4,36.1 33.85,36.55 37.45,36.55 38.25,35.75 IC2.9
  Bottom 0.813: 35.09,32.74 R6.1
N$8
  Bottom 0.2: IC1.1 21.89,34.8 R10.2 20.71,36.51
  Bottom 0.813: 20.71,36.51 R11.1
N$9
  Bottom 0.2: IC3.9 58.62,32.7 58.62,32 57.79,31.18 R19.2 55.94,32.56
  Bottom 0.6: 55.94,32.56 R25.1
N$10  (via drill 0.35 pad 0.2)
  Top 0.2: v24.98,39.38 29.02,39.38 v29.2,39.2
  Bottom 0.2: R11.2 21.88,39.38 v24.98,39.38 | R12.1 24.82,26.12 IC1.6 24.82,30.91 25.1,31.2 25.62,31.2 29.2,34.78 v29.2,39.2
N$11
  Bottom 0.2: C16.1 C15.2 R1.2 | C16.1 42.4,23.29
  Bottom 0.813: C16.1 | 42.4,23.29 R2.2 | C15.2
N$12
  Bottom 0.2: C16.2 43.36,26.18 R28.1 | 43.33,26.86 IC2.2
  Bottom 0.6: R28.1 43.33,26.86
N$13  (via drill 0.35 pad 0.2)
  Top 0.2: v43.2,39.4 43,39.6 v38.9,39.6
  Bottom 0.2: 44.82,29.02 45.06,28.78 R28.2 45.06,26.59 C15.1 | 44.82,29.02 IC2.1 | R4.1 31.64,35.45 33.53,37.33 37.71,37.33 37.71,38.41 v38.9,39.6 | 44.82,29.02 45.57,29.02 46.05,29.5 46.05,36.78 43.43,39.4 v43.2,39.4
N$15
  Bottom 0.2: 72.85,27.45 74.45,27.45 | R13.2 71.39,29.18 70.63,28.43 C19.2 R14.2 | C20.1 70.89,23.61 73.9,20.6 76.2,20.6 76.9,21.3 76.9,25 76.3,25.6
  Bottom 0.203: 76.3,25.6 74.45,27.45
  Bottom 0.6: 72.85,27.45 R14.2 | R14.2
N$16
  Bottom 0.2: C17.1 33.69,26.53 R29.2
N$17
  Bottom 0.2: C18.2 35.38,27.16 R29.1 36.18,27.64 36.38,27.43 37.58,27.43 38.17,28.03 38.17,29.16 IC2.6
N$18
  Bottom 0.2: C21.1 55.8,29.62 R19.1 56,29.42 56,28 | R18.2 56,28 | 56,28 57.84,28 IC3.7
N$19
  Bottom 0.2: R15.1 64.26,26.2 IC3.2 | 64.76,25.7 C20.2
  Bottom 0.6: R15.1 64.76,25.7
N$20
  Bottom 0.2: IC3.1 66.43,27.17 R15.2 68.35,25.73 | R16.1 70.6,25.75 C19.1
  Bottom 0.6: 68.35,25.73 R16.1
N$21
  Bottom 0.2: 28.5,4.92 U2.4
  Bottom 0.6: R32.1 28.5,4.92
N$22
  Bottom 0.2: U2.3 28.5,10.97 R35.1 28.63,12.73 | R31.1 28.66,14.09
  Bottom 0.813: 28.66,14.09 CF.2 | 28.63,12.73 R31.1
N$23  (via drill 0.35 pad 0.2)
  Top 0.2: v68.9,38.2 68.9,38.3 67.78,39.42 60.87,39.42 60.79,39.5 v57.5,39.5
  Bottom 0.2: 52.48,32.65 C21.2 52.46,31.3 50.9,31.3 | C22.1 55.09,24.36 50.9,28.55 50.9,31.3 | 50.9,31.3 50.9,35.8 | R16.2 68.37,37.67 v68.9,38.2 | 56.63,38.6 57.5,39.47 v57.5,39.5
  Bottom 0.203: 50.9,35.8 53.7,38.6 56.63,38.6
  Bottom 0.6: 52.48,32.65 R17.2
N$24
  Bottom 0.2: C22.2 58.82,25.96 56.29,25.96 R18.1
  Bottom 0.6: C22.2 59.18,26.33 IC3.6
N$25  (via drill 0.35 pad 0.2)
  Top 0.2: v86.1,29.67 88.17,29.67 v88.4,29.9
  Bottom 0.2: R42.2 83.77,33.14 | IC4.12 89.86,30.68 89.08,29.9 v88.4,29.9 | 84.78,29.67 v86.1,29.67
  Bottom 0.203: 84.78,31.9 84.78,29.67 | 84.78,31.9 IC4.8 | 83.77,33.14 83.77,32.91 84.78,31.9
N$26
  Bottom 0.2: IC4.1 92.92,26.41 R40.2 93.12,24.12 C23.1 96.57,24.12
  Bottom 0.6: 96.57,24.12 R36.1
N$27  (via drill 0.35 pad 0.2)
  Top 0.2: v86.4,38.1 86.5,38.2 90.9,38.2 v91.4,37.7
  Bottom 0.2: C24.1 94.71,22.27 C23.2 94.94,22.35 99.8,22.35 101.64,24.18 R34.2 95.4,33.64 95.4,36.6 93.95,38.05 91.75,38.05 v91.4,37.7 | R33.2 79.25,30.69 79.25,38.1 v86.4,38.1
N$28
  Bottom 0.2: 91.15,24.39 91.15,26.91 | C24.2 91.24,24.3
  Bottom 0.6: 91.15,24.39 R40.1 91.24,24.3 | 91.15,26.91 IC4.2
N$29
  Bottom 0.2: IC5.6 9.82,25.52 10.29,25.05 11.71,25.05 12.2,25.55 12.2,27.85 13.13,28.78 R23.1 13.6,30.01
  Bottom 0.6: 13.6,30.01 R30.2
N$30
  Top 0.2: R77.2 D15.C 48.5,25.58 D17.A
N$31  (via drill 0.35 pad 0.2)
  Top 0.2: v85.7,21.8 87.03,20.47 v87.73,20.47 | v93.6,20.8 93.8,20.6 96.37,20.6 98.47,22.7 99.1,22.7 v99.5,23.1
  Bottom 0.2: C25.2 82.72,23.19 C26.1 85.39,22.11 v85.7,21.8 | 98.27,24.13 R37.2 | v93.6,20.8 88.06,20.8 v87.73,20.47 | v99.5,23.1 99.14,23.46 98.93,23.46 R36.2
  Bottom 0.6: R36.2 98.27,24.13
N$32
  Bottom 0.2: IC4.6 86.05,25.55 85.48,24.99 85.29,24.99 | R38.1 84.95,25.32 85.29,24.99 | 85.29,24.99 C26.2
N$33
  Top 0.2: R76.2 D17.C 48.69,22.39 D18.A
N$34
  Bottom 0.2: R20.2 106.62,33.24 107.57,32.29 107.61,32.29 108.39,31.52 IC7.3 108.4,30.45 108.4,28.55 103.88,28.55 C30.2
N$35
  Bottom 0.2: 34.35,24.16 R5.2 31.68,28.46 | C17.2 C18.1
  Bottom 0.813: 34.35,24.16 C17.2 | C18.1 | 31.68,28.46 R4.2
N$36  (via drill 0.35 pad 0.2)
  Top 0.2: v107.5,39.4 109.75,39.4 109.75,39.45 v110.8,40.5
  Bottom 0.2: R21.1 105.82,30.48 | IC7.1 IC7.2 | R22.2 111.61,30.88 112.53,31.79 112.53,39.2 111.22,40.5 v110.8,40.5 | IC7.1 105.85,32.31 105.52,32.65 105.52,38.32 106.6,39.4 v107.5,39.4
  Bottom 0.6: 105.82,30.48 IC7.1
N$37
  Top 0.2: D24.A 72.32,25.77 D23.C R89.2
N$38  (via drill 0.35 pad 0.2)
  Top 0.2: v86.5,39.4 v90.1,39.4
  Bottom 0.2: 104.05,32.2 C30.1 101.92,34.62 97.15,39.4 v90.1,39.4 | C31.2 77.65,38.5 78.5,39.35 86.45,39.35 v86.5,39.4
  Bottom 0.6: 104.05,32.2 R21.2
N$39
  Bottom 0.2: 110.65,23.25 111.61,24.21 111.73,24.21 111.89,24.37 | R22.1 112.86,25.39 112.86,25.34 111.89,24.37 | 111.89,24.37 111.89,22.95 109.2,20.26 108.5,20.26 108.5,20.75 R24.1
  Bottom 0.203: 110.65,23.25 110.45,23.05 108.85,23.05 108.39,23.52 IC7.6 | R24.1
N$40
  Top 0.2: R43.1 LD6.C
N$41
  Top 0.2: R44.1 22.45,12.94 LD5.C
N$42
  Bottom 0.2: IC5.2 IC5.1 5,34.24 5,36.85 6.8,38.65 9.35,38.65 9.59,38.41 9.59,38.09 10.33,37.35 12.25,37.35 13.62,35.98 R30.1
N$43
  Top 0.2: R45.1 LD4.C
N$44
  Top 0.2: R46.1 LD3.C
N$45
  Top 0.2: R47.1 LD2.C
N$46
  Top 0.2: R48.1 LD1.C
N$47  (via drill 0.35 pad 0.2)
  Top 0.2: v8.8,39.8 v8.8,36.6
  Bottom 0.2: C38.1 4.02,35.07 4.02,37.26 6.56,39.8 v8.8,39.8 | IC5.3 9.54,32.25 9.54,33.23 8.8,33.97 8.8,34.4 8.64,34.57 | 8.64,34.57 R39.1 | v8.8,36.6 8.8,34.73 8.64,34.57
N$48
  Bottom 0.2: 83,27 C25.1 | R38.2 R41.1
  Bottom 0.203: IC4.7 83.11,26.93
  Bottom 0.6: 83,27 R38.2 83.11,26.93 | R41.1
N$49
  Top 0.2: R43.2 17.64,5.85 T6.3
N$50
  Top 0.2: T5.3 18.77,12.94 R44.2
N$51
  Top 0.2: T4.3 18.64,18.65 R45.2
N$52
  Top 0.2: R46.2 T3.3
N$53
  Top 0.2: T2.3 18.64,30.65 R47.2
N$54
  Top 0.2: T1.3 18.8,36.65 R48.2
N$55
  Top 0.2: T6.1 12.2,8.58 12.2,14.53 R49.1
N$56
  Top 0.2: R50.1 11.66,17.44 13.9,15.2 13.9,13.38 T5.1
N$57
  Top 0.2: R51.1 11.96,21.5 T4.1
N$58
  Top 0.2: R52.1 13.27,25 T3.1
N$59
  Top 0.2: R53.1 11.28,29.58 13.3,31.6 T2.1
N$60
  Top 0.2: T1.1 13.83,37.55 11.6,37.55 | R54.1 9.85,33.41 9.85,34.2
  Top 0.203: 11.6,37.55 11.59,37.54 11.59,36.25 11.43,36.09 11.43,35.78 10.78,35.13 9.85,34.2
N$61
  Top 0.2: C33.1 2.88,37.28 2.87,37.26 D100.1 D1.A
N$62
  Top 0.2: R54.2 9.28,31.72 D1.C 5.67,31.01 D2.A
N$63
  Top 0.2: R53.2 6.25,28.65 | 6.25,28.65 D2.C | D3.A 6.25,27.24 6.25,28.65
N$64
  Top 0.2: D4.A 3.99,21.52 3.99,22.17 D3.C R52.2
N$65
  Top 0.2: R51.2 D4.C 6.75,21.5 D6.A
N$66
  Top 0.2: R50.2 D6.C 6.3,17.47 D5.A
N$67
  Top 0.2: D5.C 6.92,14.11 6.92,8.69 7.72,7.89 8.86,7.89 9.66,8.69 9.66,13.93 R49.2
N$68
  Top 0.2: R55.1 LD11.C
N$69
  Top 0.2: R56.1 LD10.C
N$70
  Top 0.2: R57.1 LD9.C
N$71
  Top 0.2: R58.1 LD8.C
N$72
  Top 0.2: R59.1 LD7.C
N$73
  Top 0.2: R60.1 LD12.C
N$74
  Bottom 0.2: L1.2 25.08,10.74 D7.2
  Bottom 0.6: L1.2 25.26,9.22 U2.1
N$75
  Top 0.2: T7.3 40.72,6.65 R55.2
N$76
  Top 0.2: T8.3 41.06,12.65 R56.2
N$77
  Top 0.2: T9.3 41,18.65 R57.2
N$78
  Top 0.2: T10.3 41.16,24.65 R58.2
N$79
  Top 0.2: R59.2 40.65,29.95 T11.3
N$80
  Top 0.2: T12.3 41.51,36.65 R60.2
N$81
  Top 0.2: R61.1 33.58,9.97 T7.1
N$82
  Top 0.2: R62.1 36.06,15.47 T8.1
N$83
  Top 0.2: R63.1 35.43,19.6 T9.1
N$84
  Top 0.2: R64.1 34.27,25.6 T10.1
N$85
  Top 0.2: R65.1 34.88,29.73 34.88,30.35 35.43,30.9 T11.1
N$86
  Top 0.2: T12.1 35.9,37.6 34.9,36.6 34.9,33.16 R66.1
N$87
  Top 0.2: C34.1 26.24,35.06 D101.1 26.17,32.54 D16.A
N$88
  Top 0.2: D8.A 29.31,31.54 D16.C 31.84,32.2 R66.2
N$89
  Top 0.2: D9.A 29.07,27.63 D8.C R65.2
N$90
  Top 0.2: D9.C R64.2 31.52,24.55 30.73,24.55 29.28,23.1 28.57,23.1 26.98,21.5 D10.A
N$91
  Top 0.2: D11.A 26.52,18.93 D10.C R63.2
N$92
  Top 0.2: R62.2 D11.C 29.32,17.53 D12.A
N$93
  Top 0.2: D12.C R61.2
N$94
  Top 0.2: R67.1 LD18.C
N$95
  Top 0.2: R68.1 LD17.C
N$96
  Top 0.2: R69.1 LD16.C
N$97
  Top 0.2: R70.1 LD15.C
N$98
  Top 0.2: R71.1 LD14.C
N$99
  Top 0.2: R72.1 66.95,37.94 LD13.C
N$100
  Bottom 0.2: R25.2 56,34.29 | 56,34.29 56.89,34.29 IC3.8 | 56,34.29 56,35.34 54.91,36.43 54.91,37.35 55.06,37.5 56.1,37.5 56.3,37.3 66.32,37.3 66.8,36.82 66.8,34.68 66.03,33.91 66.03,32.09 66,32.06 66,31.9 63.6,31.9 63.5,32 63.5,32.76 IC3.12
N$101
  Top 0.2: T18.3 63.68,6.65 R67.2
N$102
  Top 0.2: T17.3 63.53,12.65 R68.2
N$103
  Top 0.2: T16.3 63.53,18.65 R69.2
N$104
  Top 0.2: T15.3 63.69,24.65 R70.2
N$105
  Top 0.2: T14.3 64.1,30.05 R71.2
N$106
  Top 0.2: T13.3 61.98,36.15 63.84,34.29 64.76,34.29 65.41,34.94 65.41,37.69 R72.2
N$107
  Top 0.2: T18.1 55.93,10.56 R73.1
N$108
  Top 0.2: T17.1 58.81,15.06 R74.1
N$109
  Top 0.2: T16.1 58.12,19.6 R75.1
N$110
  Top 0.2: R76.1 56.79,25.6 T15.1
N$111
  Top 0.2: R77.1 56.17,29.47 58.4,31.7 59.2,31.7 T14.1
N$112
  Top 0.2: R78.1 56.25,35.55 57.89,37.19 T13.1
N$113
  Top 0.2: C35.1 48.35,35.05 D102.1 D13.A
N$114
  Top 0.2: R78.2 54.5,31.95 D13.C 48.62,29.36 D15.A
N$115  (via drill 0.35 pad 0.2)
  Top 0.2: v38.1,32.3 v41.2,32.3
  Bottom 0.2: R6.2 36.95,34.47 IC2.8 37.5,33.92 37.5,32.9 v38.1,32.3 | IC2.12 42.06,33.36 42.05,33.35 42.05,33.15 v41.2,32.3
N$117
  Top 0.2: R75.2 D18.C 48.57,18.63 D19.A
N$118
  Top 0.2: R74.2 D19.C 48.89,15.52 D20.A
N$119
  Top 0.2: D20.C R73.2
N$120
  Top 0.2: R79.1 LD24.C
N$121
  Top 0.2: R80.1 LD23.C
N$122
  Top 0.2: R81.1 LD22.C
N$123
  Top 0.2: R82.1 LD21.C
N$124
  Top 0.2: R83.1 89.15,32.74 LD20.C
N$125
  Top 0.2: R84.1 LD19.C
N$126
  Bottom 0.2: D14.2 43.05,9.2 44.36,10.51 CCUK.2 45.29,10.8 L3.1
N$127
  Top 0.2: T24.3 86.6,6.65 R79.2
N$128
  Top 0.2: T23.3 86.67,12.65 R80.2
N$129
  Top 0.2: T22.3 86.74,18.65 R81.2
N$130
  Top 0.2: T21.3 86.69,24.65 R82.2
N$131
  Top 0.2: T20.3 85.87,30.65 87.16,31.94 R83.2
N$132
  Top 0.2: T19.3 86.88,36.65 R84.2
N$133
  Top 0.2: R85.1 79.66,9.96 T24.1
N$134
  Top 0.2: R86.1 81.95,15.64 T23.1
N$135
  Top 0.2: R87.1 82.02,19.8 T22.1
N$136
  Top 0.2: R88.1 81.35,25 T21.1
N$137
  Top 0.2: R89.1 79.86,29.76 81.7,31.6 T20.1
N$138
  Top 0.2: R90.1 79.98,36.28 81.3,37.6 T19.1
N$139
  Top 0.2: C36.1 D103.1 D22.A
N$140
  Top 0.2: D23.A 72.25,29.16 D22.C 78.23,31.95 R90.2
N$141
  Bottom 0.2: U1.1 45.05,8.76 | 45.07,8.74 L2.2
  Bottom 0.813: 45.05,8.76 CCUK.1 45.07,8.74
N$142
  Top 0.2: R88.2 D24.C 75.12,24.59 74.09,23.56 74.09,21.48 D25.A
N$143
  Top 0.2: R87.2 D25.C 75.01,19.6 73.73,19.6 D26.A
N$144
  Top 0.2: R86.2 D26.C 72.19,15.26 D27.A
N$145
  Top 0.2: D27.C R85.2
N$146
  Top 0.2: R91.1 LD29.C
N$147
  Top 0.2: R92.1 LD28.C
N$148
  Top 0.2: R93.1 LD27.C
N$149
  Top 0.2: R94.1 LD26.C
N$150
  Top 0.2: R95.1 LD25.C
N$151
  Top 0.2: R96.1 LD30.C
N$152
  Bottom 0.2: 48.68,14.18 RFB1.2 RFB2.1 | U1.3 48.67,8.91 RFB2.1
  Bottom 0.813: 48.68,14.18 CFF.2 | RFB2.1
N$153
  Top 0.2: T30.3 R91.2
N$154
  Top 0.2: T29.3 R92.2
N$155
  Top 0.2: T28.3 111.13,18.65 R93.2
N$156
  Top 0.2: T27.3 111.1,24.65 R94.2
N$157
  Top 0.2: T26.3 110.81,30.65 R95.2
N$158
  Top 0.2: T25.3 111.16,36.65 R96.2
N$159
  Top 0.2: R97.1 103.42,10.02 T30.1
N$160
  Top 0.2: R98.1 103.49,17.51 105.82,15.18 T29.1
N$161
  Top 0.2: T28.1 103.85,21.5 R99.1
N$162
  Top 0.2: R100.1 105.3,25 T27.1
N$163
  Top 0.2: R101.1 103.66,29.46
  Top 0.254: 103.66,29.46 105.8,31.6 T26.1
N$164
  Top 0.2: R102.1 102.7,32.81 102.7,34.7 105.6,37.6 T25.1
N$165
  Top 0.2: C37.1 95.7,35.03 D104.1 95.73,32.04 D29.A
N$166
  Top 0.2: R102.2 D29.C 96.06,29.57 D30.A
N$167
  Top 0.2: D31.A 96.19,25.83 | D30.C R101.2
  Top 0.203: 96.19,25.83 96.96,26.6 98.8,26.6 98.86,26.66 D30.C
N$168
  Top 0.2: R100.2 D31.C 95.88,21.89 D32.A
N$169
  Top 0.2: R99.2 D32.C 95.84,18.66 D33.A
N$170
  Top 0.2: R98.2 D33.C 95.67,15.03 D34.A
N$171
  Top 0.2: D34.C R97.2
N$181
  Bottom 0.2: R3.1 36.51,29.71 IC2.7
N$183
  Bottom 0.2: R41.2 83.01,31.41 | IC4.9 86.05,33.25 84.9,34.4 80.9,34.4 80.65,34.15 80.65,32 81.25,31.4 83,31.4
  Bottom 0.6: R42.1 83.01,31.41 83,31.4
PB5V
  Bottom 0.6: L1.1 25.08,6.77 25.15,6.7 26.59,6.7 U2.5 26.61,4.95 R32.2 | 25.47,4.83 C5.1 | 19.42,7.83 R26.2
  Bottom 0.813: R32.2 25.47,4.83 | L1.1 19.42,7.83 | J2.2 C42.1 C40.2 C41.1 | R26.2 R26.1 17.7,8.3 16.45,9.55 16.45,13.6 15.69,14.36 C41.1 | C41.1 14.45,15.25 R104.2
TP_OUT  (via drill 0.35 pad 0.2)
  Top 0.2: D100.2 3.6,32.07 3.6,30.7 3.4,30.5 2,30.5 1.8,30.7 1.8,38.1 5.68,41.98 20.28,41.98 25.14,37.12 25.49,37.48 25.49,38.58 25.61,38.7 26.87,38.7 26.99,38.58 26.99,36.24 30.48,32.75 32.62,32.75 32.74,32.63 32.74,24.44 32.55,24.25 30.85,24.25 29.4,22.8 28.7,22.8 26.9,21 25.68,21 25.57,21.12 25.57,21.88 25.8,22.12 25.8,22.9 v25.4,23.3
  Bottom 0.2: IC1.7 23.55,25.69 R12.2 23.57,24.63 24.9,23.3 v25.4,23.3
V+  (via drill 0.6)
  Top 0.813: LD6.A LD5.A LD4.A 24.25,22.5 | 24.25,22.5 LD3.A LD2.A LD1.A | LD12.A LD7.A | LD7.A LD8.A LD9.A LD10.A LD11.A | LD18.A LD17.A LD16.A 69.75,22 | 69.75,22 LD15.A LD14.A LD13.A | LD24.A LD23.A LD22.A | LD22.A LD21.A LD20.A LD19.A | LD29.A LD28.A LD27.A 116.85,18.74 116.85,24.54 LD26.A 116.75,25.9 | 116.75,25.9 LD25.A LD30.A | v22.7,22.64 22.8,22.55 22.82,22.55 22.86,22.5 24.25,22.5 | v48.2,30.5 46.88,30.5 LD7.A | v114.19,25.81 116.66,25.81 116.75,25.9 | v67.35,21.05 68.3,22 69.75,22 | LD22.A 93.94,18.64 v94.2,18.9
  Bottom 0.813: R27.2 R104.1 16.05,17.45 16.05,19.65 | 16.05,19.65 18.5,19.65 | 18.5,19.65 39.8,19.65 | 59.5,18.65 38.8,18.65 39.8,19.65 | 59.5,18.65 61.5,18.65 | 84.8,18.65 61.5,18.65 | v94.2,18.9 94.45,18.65 | IC1.8 22.27,26.07 C27.1 22.04,23.19 | 39.8,19.65 40.15,20 C28.1 40.59,27.26 40.59,27.61 40.79,27.82 IC2.4 | IC3.4 61.72,26.28 C29.1 61.35,25.41 62.3,24.46 62.3,22.3 | IC4.4 88.59,25.57 88.5,25.48 88.5,25.12 C32.1 88.06,21.91 84.8,18.65 | 18.5,19.65 22.04,23.19 | 22.04,23.19 22.15,23.19 v22.7,22.64 | v114.19,25.81 112.5,24.12 112.5,22.69 108.45,18.65 102.1,18.65 | 84.8,18.65 94.45,18.65 | 61.5,18.65 62.3,19.45 62.3,22.3 | v67.35,21.05 63.55,21.05 62.3,22.3 | v48.2,30.5 50,28.7 50,27.7 50.45,27.7 59.5,18.65 | IC5.8 7.29,24.95 | 7.29,24.95 C9.1 | 16.05,19.65 11.64,19.65 8.09,23.2 8.09,23.81 7.29,24.61 7.29,24.95 | 94.45,18.65 102.1,18.65 | 102.1,18.65 105.64,22.19 C39.1 105.84,23.3 IC7.8
V-  (via drill 0.6)
  Top 0.813: v10.7,38.55 10.7,36.62 v10.32,36.24 | v114.3,39.1 113.65,38.45 v111.41,38.45 | v64.3,35.4 64.3,36.44 62.14,38.6 v62,38.6
  Bottom 0.2: v64.3,35.4 64.2,35.5
  Bottom 0.6: IC5.4 11.1,33.99 C8.2
  Bottom 0.813: 111.37,38.41 C4.2 111.37,32.17 IC7.4 | 111.37,38.41 111.37,38.48 109.05,40.8 89.1,40.8 88.92,40.62 | v10.7,38.55 12.95,40.8 25.7,40.8 26.4,40.1 | v10.32,36.24 10.6,35.96 C8.2 | IC2.11 40.79,36.39 C11.2 41.15,40.05 39.7,41.5 | IC4.11 88.59,34.02 C13.2 88.92,40.62 | R105.2 109.5,17.4 | 109.5,17.4 116.35,24.25 116.35,37.75 115,39.1 v114.3,39.1 | v111.41,38.45 111.37,38.41 | R103.2 21.7,2.5 83.25,2.5 93.1,12.35 104.45,12.35 109.5,17.4 | IC3.11 61.72,35.09 C12.2 64.2,35.5 | IC1.4 26.09,36.31 C10.2 26.4,40.1 | 61.7,41.6 39.8,41.6 39.7,41.5 | 61.7,41.6 88,41.6 88.92,40.68 88.92,40.62 | 39.7,41.5 27.8,41.5 26.4,40.1 | 61.7,41.6 62.13,41.17 62.13,38.66 62.07,38.6 v62,38.6

## Text on the board
PRINT: Body - Synth / Equalizer & VU Meter / DSP - Lab SS21